# EAGLE board 5vac-dcreg (EAGLE 9.6.2)
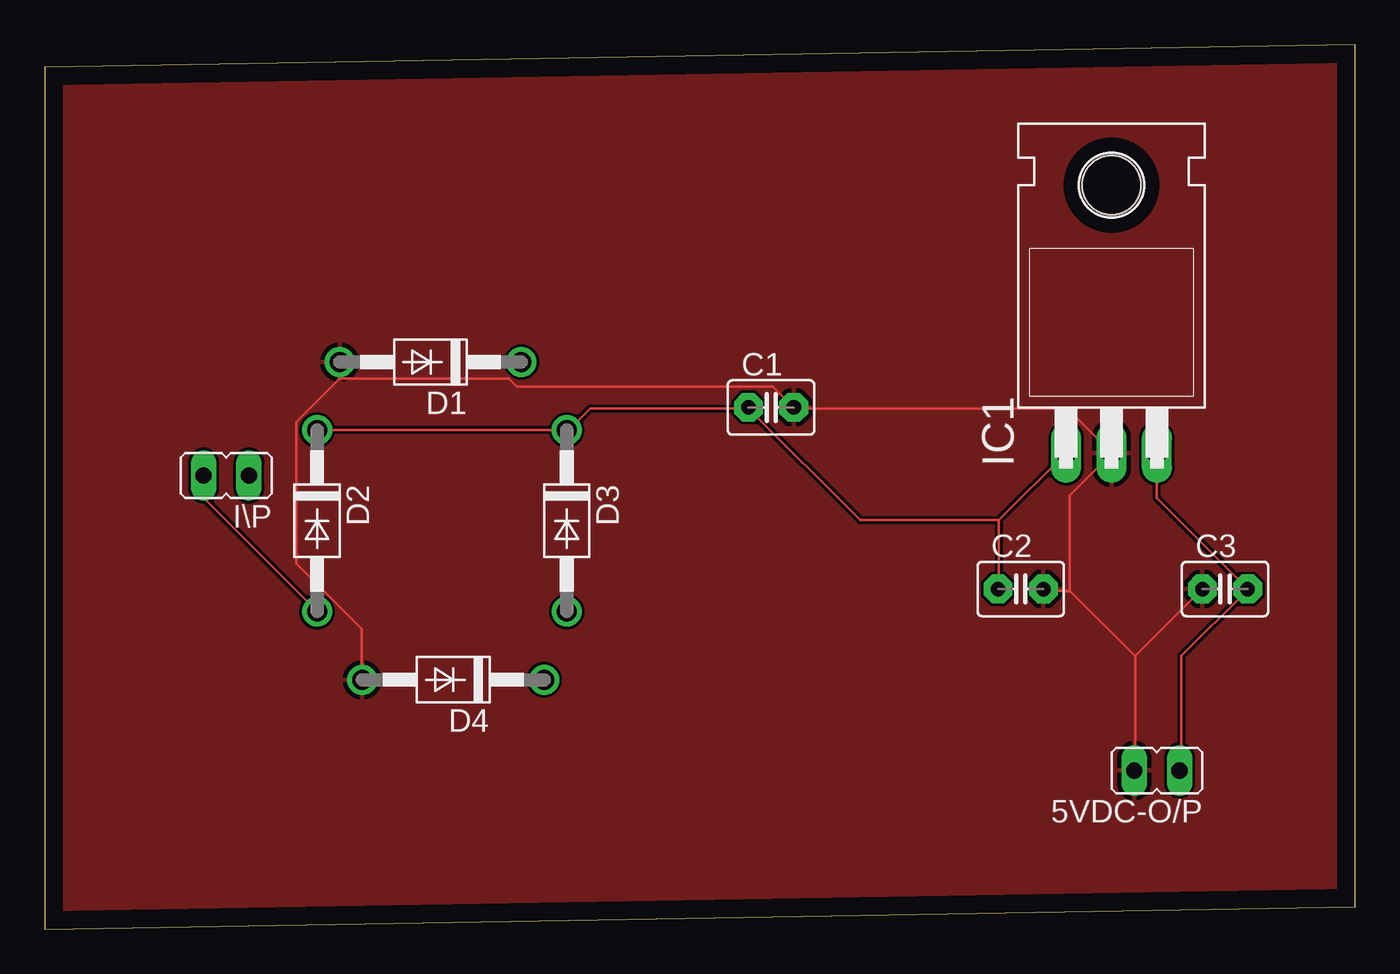
[diagram p0: board, top side]
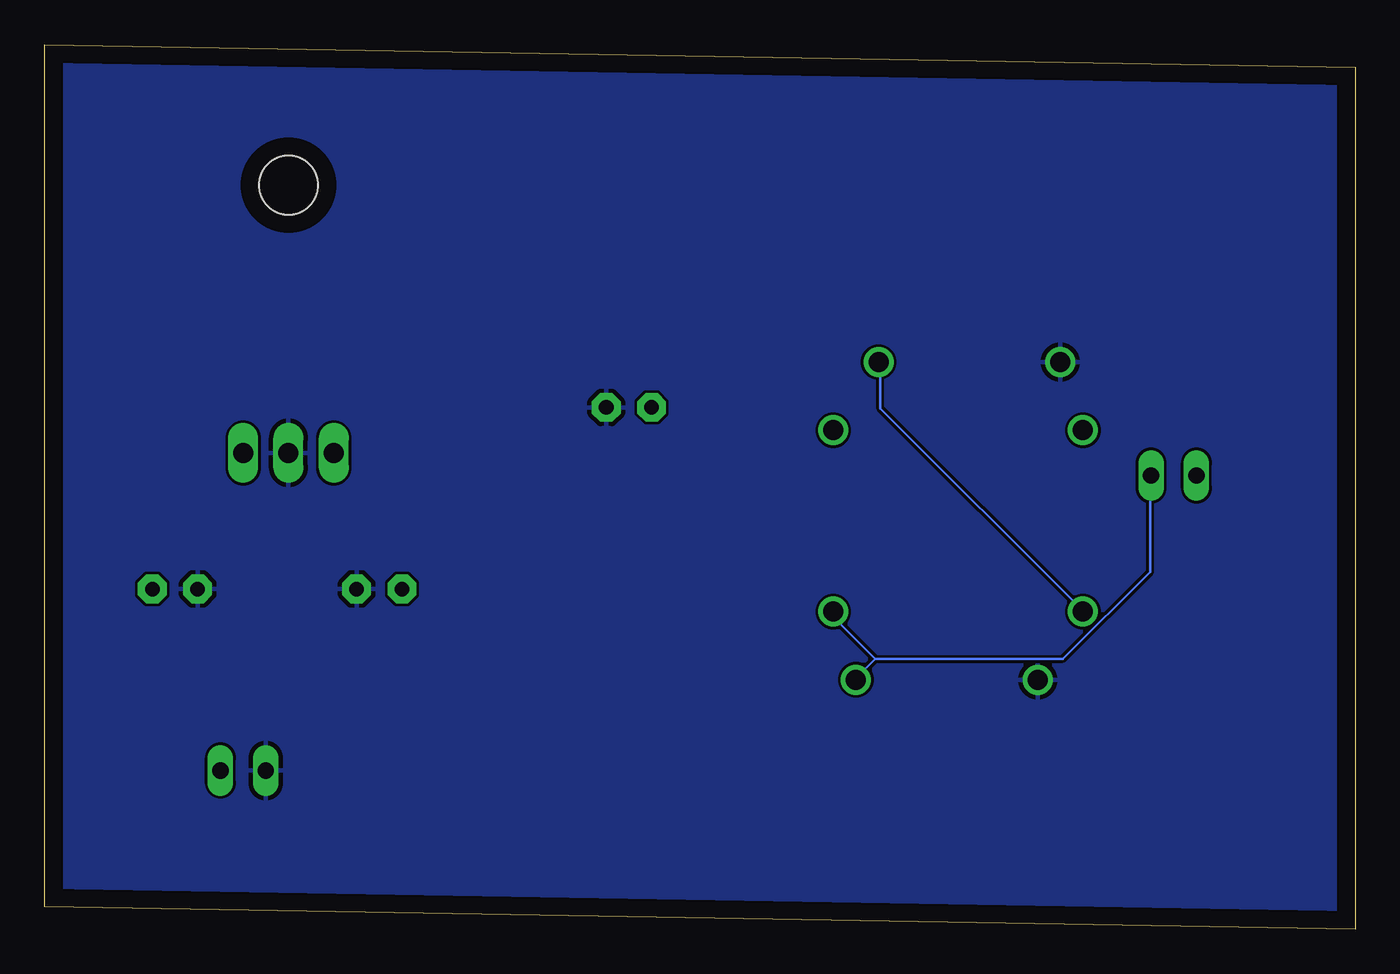
[diagram p1: board, bottom side, seen from below]

Size 73.33 x 49.52 mm. Coordinates in mm from the lower left corner, seen from the top.
Outline: 0,0 73.33,1.27 73.33,49.52 0,48.25 0,0
Copper layers (1*16): Top 0.035mm / dielectric 1.5mm / Bottom 0.035mm
Design rules "default": minimum track width 6mil, minimum drill 0.35mm, track to track 6mil, track to pad 6mil, pad to pad 6mil, via to via 6mil, smd to smd 6mil, copper to edge 40mil, drill to drill 6mil, minimum pad ring 10mil, minimum via ring 8mil, stop-mask expansion 4mil, vias tented up to drill 0mil, thermal gap 10mil

## Footprints (pad centres in the part's own frame; a part is rotated, then mirrored left to right if it is on the bottom)
JP1 = drill 0.914 long: 1 0,-1.27; 2 0,1.27
C2.5-3 = drill 0.813 pad 1.6 octagon: 1 -1.27,0; 2 1.27,0
DO41-10 = drill 1.118: A 5.08,0; C -5.08,0
TO220H = drill 1.118 long: 1 -2.54,-10.16; 2 0,-10.16; 3 2.54,-10.16 | hole 3.302: 0,4.826

## Placement (x,y rotation side)
5VDC-O/P  5v  [JP1]  62.23,8.89 90 top
C1  1000  [C2.5-3]  40.64,29.21 0 top
C2  0.33  [C2.5-3]  54.61,19.05 0 top
C3  0.1  [C2.5-3]  66.04,19.05 0 top
D1  1N4004  [DO41-10]  21.59,31.75 180 top
D2  1N4004  [DO41-10]  15.24,22.86 270 top
D3  1N4004  [DO41-10]  29.21,22.86 270 top
D4  1N4004  [DO41-10]  22.86,13.97 180 top
I\P  12v  [JP1]  10.16,25.4 90 top
IC1  7805T  [TO220H]  59.69,36.83 0 top

## Library data of the parts
5VDC-O/P I\P = jumper
C1-C3 = capacitor-wima
D1-D4 = diode
IC1 = linear

## Nets
GND: 5VDC-O/P.2 C1.2 C2.2 C3.1 D1.A D4.A IC1.2
N$1: D1.C D2.A I\P.2
N$2: C1.1 C2.1 D2.C D3.C IC1.1
N$4: D3.A D4.C I\P.1
N$5: 5VDC-O/P.1 C3.2 IC1.3

## Tracks (layer width: path | path; a pad name or v marks a point on that pad's centre or on a via)
GND
  Top 0.152: 16.51,30.84 D1.A | 16.51,30.84 14.07,28.4 14.07,20.47 17.73,16.81 17.73,14.07 D4.A | 61.01,15.29 61.01,8.89 5VDC-O/P.2 | C3.1 61.01,15.29 | 57.35,18.95 55.98,18.95 C2.2 | 61.01,15.29 57.35,18.95 | 57.35,18.95 57.35,24.28 59.64,26.57 IC1.2 57.2,29.16 41.96,29.16 C1.2 40.74,30.38 26.42,30.38 25.96,30.84 16.51,30.84
  pour Top: -2.54,50.8 77.47,50.8 77.47,-1.27 -5.08,-1.27 -5.08,48.26
  pour Bottom: -11.43,54.61 82.55,54.61 82.55,-6.35 -12.7,-6.35 -12.7,53.34
N$1
  Top 0.152: I\P.2 8.89,24.13 D2.A
  Bottom 0.152: D1.C 26.57,31.75 26.57,29.16 15.29,17.88 D2.A
N$2
  Top 0.152: 53.39,22.91 53.39,19.1 C2.1 | IC1.1 53.39,22.91 | 39.37,29.16 30.53,29.16 29.31,27.94 D3.C D2.C | 53.39,22.91 45.62,22.91 39.37,29.16 | 39.37,29.16 C1.1
N$4
  Bottom 0.152: 26.87,15.14 16.36,15.14 11.48,20.02 11.48,25.35 I\P.1 | 26.87,15.14 27.94,14.07 D4.C | 26.87,15.14 29.16,17.42 29.16,17.73 D3.A
N$5
  Top 0.152: 5VDC-O/P.1 63.6,8.89 63.6,15.29 67.26,18.95 C3.2 62.23,24.13 IC1.3